# Altium PCB PCB1.PcbDoc
Units mil, origin at the board's own origin, x right, y up, seen from the top; angles counter-clockwise.
Board outline 2165.35 x 2165.35 mil, 4 copper layers (Top Layer, Int1 (GND), Int2 (PWR), Bottom Layer), stack 63.976 mil thick; 76 components, 69 nets, 302 pads, 1 vias.
Unrouted connection lines stored in the file: 210.
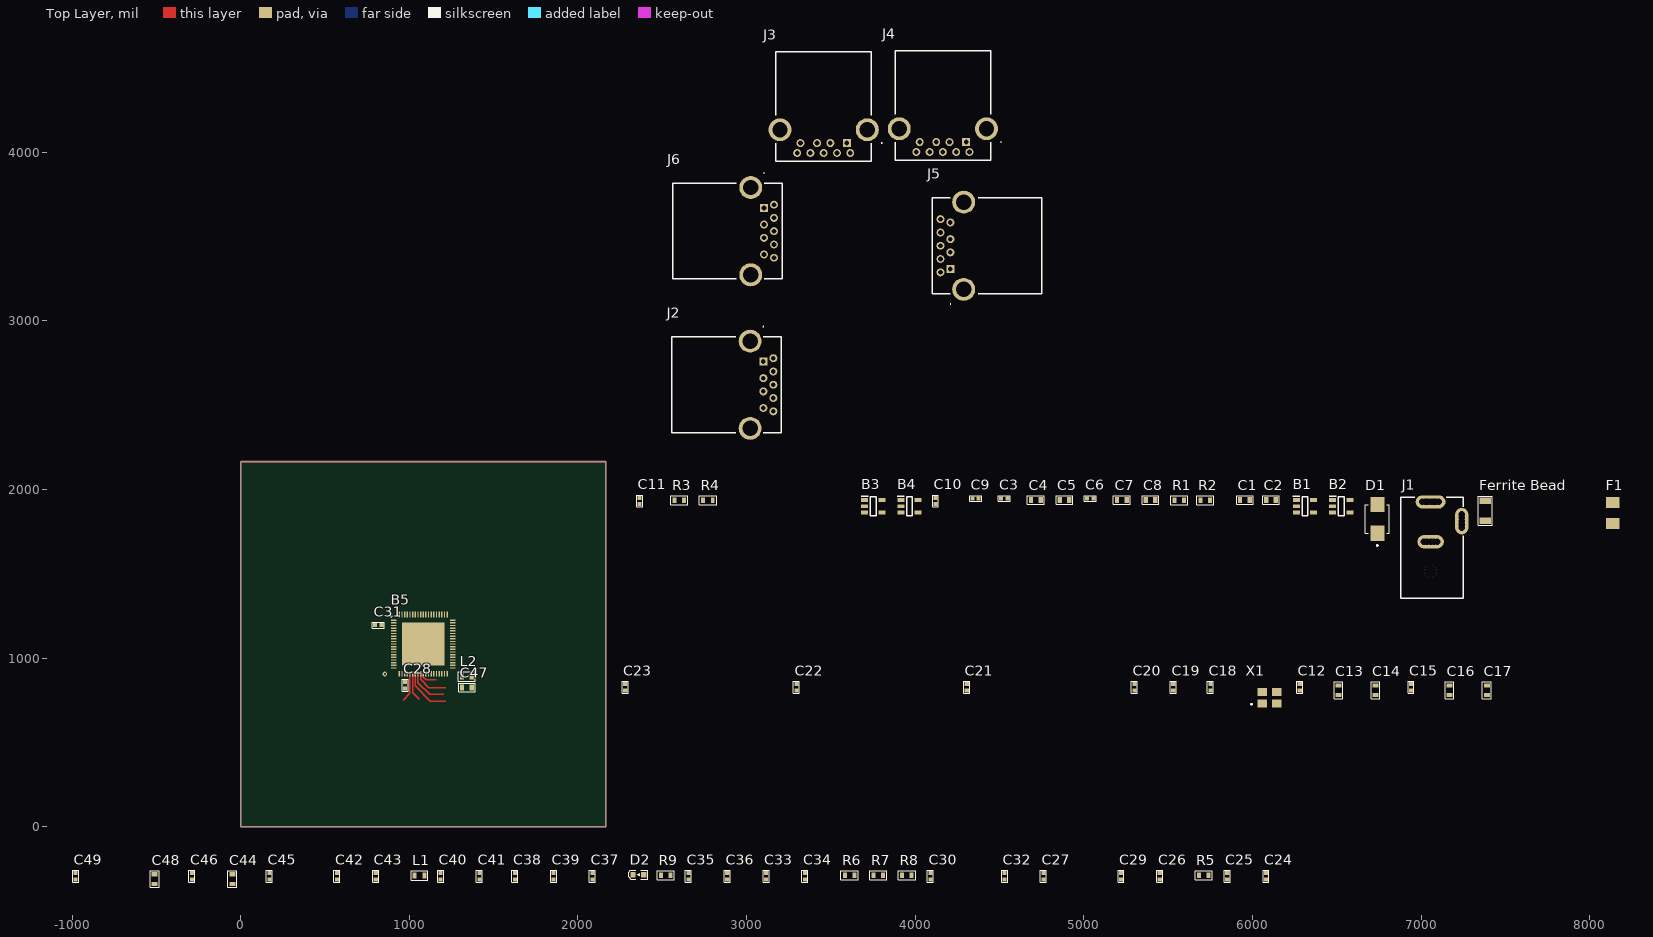
[diagram p0: Top Layer view]
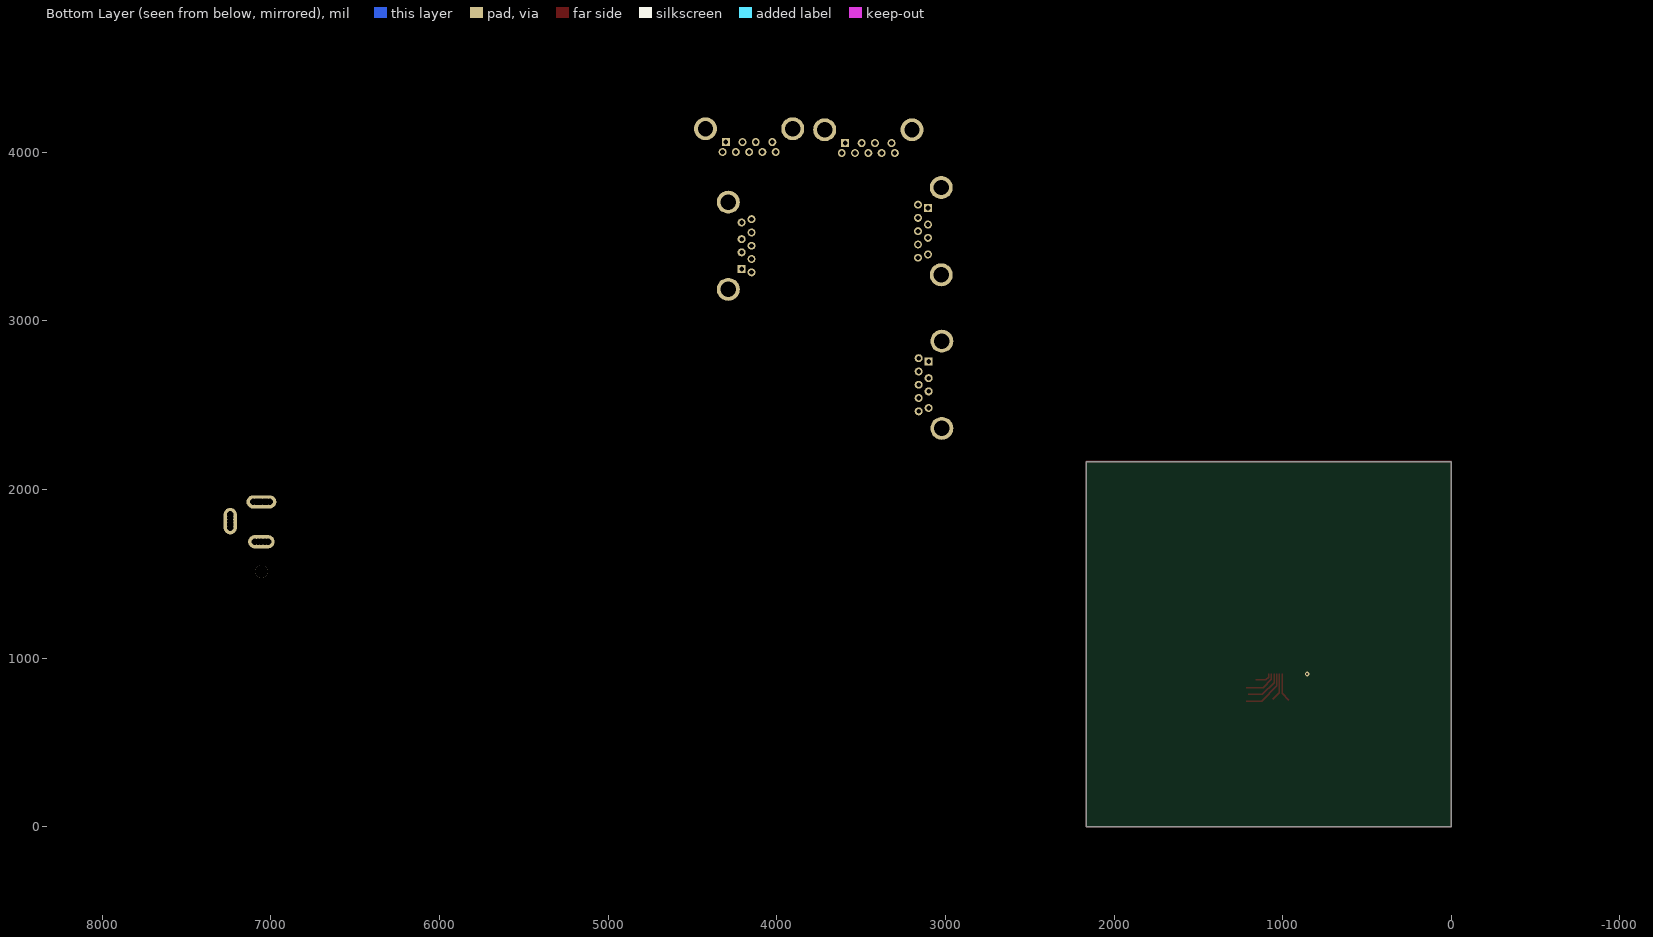
[diagram p1: Bottom Layer view, seen from below]
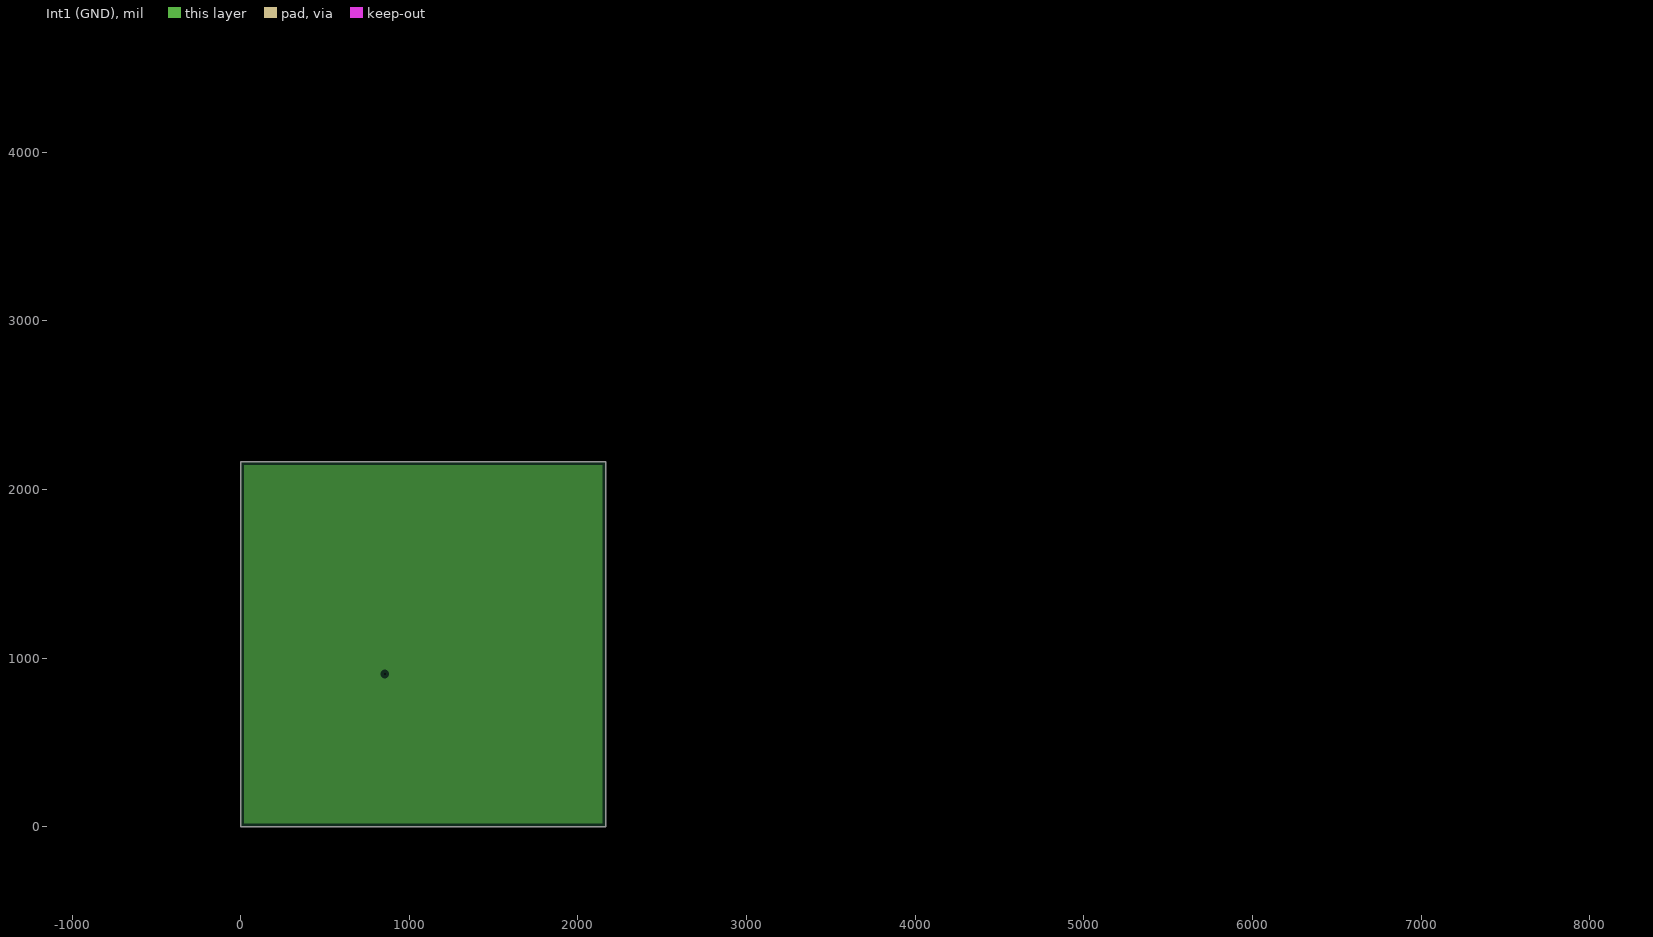
[diagram p2: Int1 (GND), clearances drawn from the general rule]
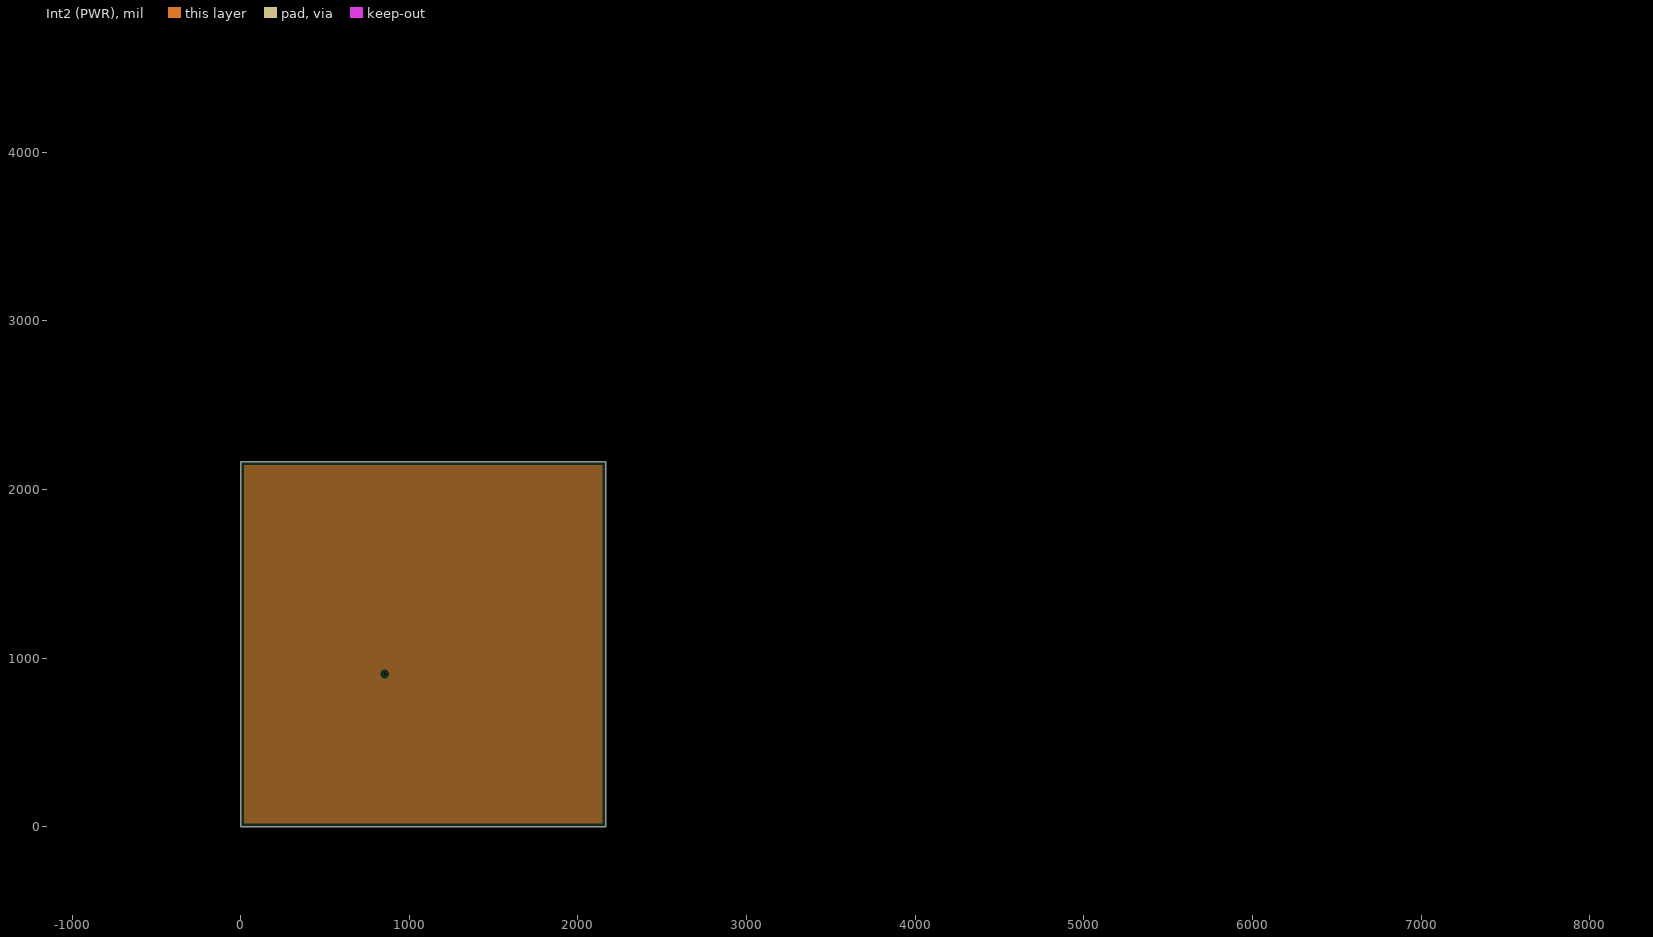
[diagram p3: Int2 (PWR), clearances drawn from the general rule]

## Layer stack, top to bottom
Top Solder: solder mask 1, SM-001, Dk 4
Top Layer: signal copper 1.378
Dielectric 1: prepreg 8.2677, PP-017, Dk 4.3
Int1 (GND): plane copper 0.689
Dielectric 3: core 43.3071, Core-039, Dk 4.8
Int2 (PWR): plane copper 0.689
Dielectric 5: prepreg 8.2677, PP-017, Dk 4.3
Bottom Layer: signal copper 1.378
Bottom Solder: solder mask 1, SM-001, Dk 4

## Board outline
0,0 0,2165.35 2165.35,2165.35 2165.35,0

## Design rules (kind name [scope] priority, off if disabled: settings)
Clearance [All] p1: gap=5 ignorepadtopadclearanceinfootprint=FALSE
DiffPairsRouting [All] p1: maxlimit=10 minlimit=10 mostfreqgap=10 toplayer_minwidth=15 toplayer_maxwidth=15 toplayer_prefwidth=15 bottomlayer_minwidth=15 bottomlayer_maxwidth=15 bottomlayer_prefwidth=15 maxuncoupledlength=500
PlaneClearance [All] p1: clearance=20
PlaneConnect [All] p1: planeconnectstyle=Relief reliefexpansion=20 reliefentries=4 reliefconductorwidth=10 reliefairgap=10
PolygonConnect [All] p1: connectstyle=Direct reliefconductorwidth=10 reliefentries=4 polygonreliefangle="90 Angle" airgapwidth=10
RoutingVias [All] p1: holewidth=28 width=50 viastyle="Through Hole" minholewidth=7.87 minwidth=17.72 maxholewidth=28 maxwidth=50
SolderMaskExpansion [All] p1: expansion=4 istentingtop=FALSE
SupplyNets "Schematic Supply Nets_11" [InNet('USB2')] p1: voltage=0.000
SupplyNets "Schematic Supply Nets_10" [InNet('USB3')] p2: voltage=0.000
SupplyNets "Schematic Supply Nets_9" [InNet('+5 Bus')] p3: voltage=0.000
SupplyNets "Schematic Supply Nets_8" [InNet('GND')] p4: voltage=0.000
SupplyNets "Schematic Supply Nets_7" [InNet('+5')] p5: voltage=0.000
SupplyNets "Schematic Supply Nets_6" [InNet('GNDGND')] p6: voltage=0.000
SupplyNets "Schematic Supply Nets_5" [InNet('USB4')] p7: voltage=0.000
SupplyNets "Schematic Supply Nets_4" [InNet('USB Bus')] p8: voltage=0.000
SupplyNets "Schematic Supply Nets_3" [InNet('+3v3')] p9: voltage=0.000
SupplyNets "Schematic Supply Nets_2" [InNet('USB1')] p10: voltage=0.000
SupplyNets "Schematic Supply Nets" [InNet('+1v1 Fil')] p11: voltage=0.000
Width [All] p1: maxlimit=39.37 minlimit=7.87 preferedwidth=11.81
27 further rules are at their usual default settings.

## Classes and differential pairs
differential pair SSTXO4: +SSTXO4_P -SSTXO4_N
differential pair SSTXO3: +SSTXO3_P -SSTXO3_N
differential pair SSTXO2: +SSTXO2_P -SSTXO2_N
differential pair SSTXO1: +SSTXO1_P -SSTXO1_N
differential pair SSTXI: +SSTXI_P -SSTXI_N
differential pair SSRXO4: +SSRXO4_P -SSRXO4_N
differential pair SSRXO3: +SSRXO3_P -SSRXO3_N
differential pair SSRXO2: +SSRXO2_P -SSRXO2_N
differential pair SSRXO1: +SSRXO1_P -SSRXO1_N
differential pair SSRXI: +SSRXI_P -SSRXI_N
differential pair DO4: +DO4_P -DO4_N
differential pair DO3: +DO3_P -DO3_N
differential pair DO2: +DO2_P -USB2
differential pair DO1: +DO1_P -DO1_N
differential pair DI: +DI_P -DI_N

## Components (designator, comment, footprint, x,y, rotation, side; value= is the part's Value field where it differs from the comment)
B1 "AP22818BKAWT-7" SOT95P280X100-5N 6311.73,1900 r0 top
B2 "AP22818BKAWT-7" SOT95P280X100-5N 6526.73,1900 r0 top
B3 "AP22818BKAWT-7" SOT95P280X100-5N 3751.73,1900 r0 top
B4 "AP22818BKAWT-7" SOT95P280X100-5N 3966.73,1900 r0 top
B5 "VL817-Q7_B0_" QFN40P900X900X90-77N-D 1082.68,1082.68 r0 top
C1 "10u" CAP0603 5831.73,1875 r0 top
C2 "10u" CAP0603 5986.73,1875 r0 top
C3 "100nF" CAP0402 4401.73,1840 r0 top
C4 "10u" CAP0603 4591.73,1875 r0 top
C5 "1u" CAP0603 4761.73,1875 r0 top
C6 "100nF" CAP0402 4911.73,1840 r0 top
C7 "10u" CAP0603 5101.73,1875 r0 top
C8 "1u" CAP0603 5271.73,1875 r0 top
C9 "100nF" CAP0402 4231.73,1840 r0 top
C10 "100nF" CAP0402 4226.73,1805 r90 top
C11 "33p" CAP0402 2471.73,1805 r90 top
C12 "100nF" CAP0402 6386.73,700 r90 top
C13 "10u" CAP0603 6571.73,685 r90 top
C14 "1u" CAP0603 6791.73,685 r90 top
C15 "100nF" CAP0402 7046.73,700 r90 top
C16 "10u" CAP0603 7231.73,685 r90 top
C17 "1u" CAP0603 7451.73,685 r90 top
C18 "33p" CAP0402 5856.73,700 r90 top
C19 "100nF" CAP0402 5636.73,700 r90 top
C20 "100nF" CAP0402 5406.73,700 r90 top
C21 "100nF" CAP0402 4411.73,700 r90 top
C22 "100nF" CAP0402 3401.73,700 r90 top
C23 "100nF" CAP0402 2386.73,700 r90 top
C24 "100nF" CAP0402 6186.73,-420 r90 top
C25 "100nF" CAP0402 5956.73,-420 r90 top
C26 "100nF" CAP0402 5556.73,-420 r90 top
C27 "100nF" CAP0402 4866.73,-420 r90 top
C28 "100nF" CAP0402 1081.06,712.56 r90 top
C29 "100nF" CAP0402 5326.73,-420 r90 top
C30 "100nF" CAP0402 4196.73,-420 r90 top
C31 "100nF" CAP0402 689.76,1088.94 r0 top
C32 "100nF" CAP0402 4636.73,-420 r90 top
C33 "100nF" CAP0402 3221.73,-420 r90 top
C34 "100nF" CAP0402 3451.73,-420 r90 top
C35 "100nF" CAP0402 2761.73,-420 r90 top
C36 "100nF" CAP0402 2991.73,-420 r90 top
C37 "100nF" CAP0402 2191.73,-420 r90 top
C38 "100nF" CAP0402 1731.73,-420 r90 top
C39 "100nF" CAP0402 1961.73,-420 r90 top
C40 "100nF" CAP0402 1291.73,-420 r90 top
C41 "100nF" CAP0402 1521.73,-420 r90 top
C42 "100nF" CAP0402 676.73,-420 r90 top
C43 "100nF" CAP0402 906.73,-420 r90 top
C44 "10u" CAP0603 11.73,-435 r90 top
C45 "100nF" CAP0402 276.73,-420 r90 top
C46 "100nF" CAP0402 -183.27,-420 r90 top
C47 "10u" CAP0603 1217.76,763.27 r0 top
C48 "4u7" CAP0603 -448.27,-435 r90 top
C49 "100nF" CAP0402 -873.27,-420 r90 top
D1 "SMBJ5V0A" DIOM4336X265N 6741.73,1825 r90 top
D2 "LED0603" LED_SMD_0603 716.73,-2075 r0 top
F1 "1206L300SLTHYR" FUSC3115X66N 8136.73,1860 r90 top
"Ferrite Bead" "HCB3216KF-601T30" IND1206 7526.73,1615 r90 top
J1 "Power Jack" "Power Jack" 7056.73,1355 r90 top
J2 "GSB4111312HR" GSB4111312HR 3100,2758.43 r0 top
J3 "GSB4111312HR" GSB4111312HR 3595.31,4054.06 r270 top
J4 "GSB4111312HR" GSB4111312HR 4302.17,4060 r270 top
J5 "GSB4111312HR" GSB4111312HR 4209.06,3307.2 r180 top
J6 "GSB4111312HR" GSB4111312HR 3103.74,3669.13 r0 top
L1 "2u2" IND0603 1061.73,-410 r0 top
L2 "4u7" IND0603 1339.76,1010.51 r180 top
R1 "100K" RES0603 5396.73,1880 r0 top
R2 "100K" RES0603 5551.73,1880 r0 top
R3 "100K" RES0603 2431.73,1880 r0 top
R4 "100K" RES0603 2601.73,1880 r0 top
R5 "6k04 1%" RES0603 5541.73,-345 r0 top
R6 "330" RES0603 3441.73,-345 r0 top
R7 "330" RES0603 3611.73,-345 r0 top
R8 "100K" RES0603 3781.73,-345 r0 top
R9 "100K" RES0603 2351.73,-345 r0 top
X1 "YSX321SL" YSX321SL 6101.73,765 r0 top

## Footprints (in the part's own frame and the unit in brackets; to place one, negate y for a bottom-side part, rotate by r counter-clockwise, add the part's x,y. Pads: shape width x height; smd on the part's side, far side on the other; paste and mask are expansions set on the pad)
CAP0402 [mm]
  rect 0.6x0.62 smd mask+0.06: 1(2.729,2.694) 2(3.689,2.694)
  silkscreen extent 2.31,2.24 4.11,3.14, body extent 2.66,2.42 3.76,2.97, height 0.32
CAP0603 [mm]
  rect 0.65x0.9 smd: 1(2.417,1.568) 2(3.867,1.568)
  silkscreen extent 1.89,0.92 4.39,2.22, body extent 2.32,1.14 3.97,1.99, height 0.4
DIOM4336X265N [mm]
  rect 2.28x2.12 smd: A(2.165,0) C(-2.165,0)
  silkscreen extent -4.1,-1.81 2.16,1.81, body extent -2.67,-1.81 2.67,1.81, height 2.65
FUSC3115X66N [mm]
  rect 1.65x2.03 smd: 1(-1.59,0) 2(1.59,0)
  body extent -1.59,-0.76 1.59,0.76, height 0.66
GSB4111312HR [mm]
  rect 1.2x1.2 hole 0.7: 1(0,0)
  round 1.2 hole 0.7: 2(0,-2.5) 3(0,-4.5) 4(0,-7) 5(1.5,-7.5) 6(1.5,-5.5) 7(1.5,-3.5) 8(1.5,-1.5) 9(1.5,0.5)
  round 3.45 hole 2.3: 10(-2,3.07) 11(-2,-10.07)
  silkscreen extent -13.78,-10.7 2.72,5.3
IND0603 [mm]
  rect 0.62x0.92 smd: 1(-0.768,3.061) 2(0.722,3.061)
  silkscreen extent -1.27,2.36 1.23,3.76, body extent -0.85,2.64 0.8,3.49, height 0.4
IND1206 [mm]
  rect 1.04x1.74 smd: 1(5.056,3.717) 2(8.076,3.717)
  silkscreen extent 4.37,2.67 8.77,4.77, body extent 4.92,2.87 8.22,4.57, height 0.94
LED_SMD_0603 [mm]
  rect 0.8x0.8 smd: 1(40.894,45.466) 2(42.494,45.466)
  silkscreen extent 40.24,44.81 43.15,46.12, body extent 40.89,45.07 42.49,45.87, height 0.7
"Power Jack" [mm] "Power Adaptor Jack"
  round 1.5 hole 1: 1(14.5,-1.25) 1(14.5,-0.8) 1(14.5,-0.4) 1(14.5,0.4) 1(14.5,0.8) 1(14.5,1.25) 2(8.5,-1) 2(8.5,1) 2(8.5,-0.5) 2(8.5,0.5) 3(10.6,-4.7) 3(11.1,-4.7) 3(12.1,-4.7) 3(12.6,-4.7)
  oval 2x4.5 hole 1: 1(14.5,0)
  oval 2x4 hole 1: 2(8.5,0)
  oval 4x2 hole 1: 3(11.6,-4.7)
  round 1.9 hole 2: MH(4,0)
  silkscreen extent 0,-4.9 15.2,4.5, body extent 0,-4.9 15.2,4.5, height 11
QFN40P900X900X90-77N-D [mm]
  rect 0.85x0.2 smd: 1(-4.45,3.6) 2(-4.45,3.2) 3(-4.45,2.8) 4(-4.45,2.4) 5(-4.45,2) 6(-4.45,1.6) 7(-4.45,1.2) 8(-4.45,0.8) 9(-4.45,0.4) 10(-4.45,0) 11(-4.45,-0.4) 12(-4.45,-0.8) 13(-4.45,-1.2) 14(-4.45,-1.6) 15(-4.45,-2) 16(-4.45,-2.4) 17(-4.45,-2.8) 18(-4.45,-3.2) 19(-4.45,-3.6) 39(4.45,-3.6) 40(4.45,-3.2) 41(4.45,-2.8) 42(4.45,-2.4) 43(4.45,-2) 44(4.45,-1.6) 45(4.45,-1.2) 46(4.45,-0.8) 47(4.45,-0.4) 48(4.45,0) 49(4.45,0.4) 50(4.45,0.8) 51(4.45,1.2) 52(4.45,1.6) 53(4.45,2) 54(4.45,2.4) 55(4.45,2.8) 56(4.45,3.2) 57(4.45,3.6)
  rect 0.2x0.85 smd: 20(-3.6,-4.45) 21(-3.2,-4.45) 22(-2.8,-4.45) 23(-2.4,-4.45) 24(-2,-4.45) 25(-1.6,-4.45) 26(-1.2,-4.45) 27(-0.8,-4.45) 28(-0.4,-4.45) 29(0,-4.45) 30(0.4,-4.45) 31(0.8,-4.45) 32(1.2,-4.45) 33(1.6,-4.45) 34(2,-4.45) 35(2.4,-4.45) 36(2.8,-4.45) 37(3.2,-4.45) 38(3.6,-4.45) 58(3.6,4.45) 59(3.2,4.45) 60(2.8,4.45) 61(2.4,4.45) 62(2,4.45) 63(1.6,4.45) 64(1.2,4.45) 65(0.8,4.45) 66(0.4,4.45) 67(0,4.45) 68(-0.4,4.45) 69(-0.8,4.45) 70(-1.2,4.45) 71(-1.6,4.45) 72(-2,4.45) 73(-2.4,4.45) 74(-2.8,4.45) 75(-3.2,4.45) 76(-3.6,4.45)
  rect 6.45x6.45 smd: 77(0,0)
  silkscreen extent -4.97,4.1 -4.77,4.3
RES0603 [mm]
  rect 0.6x0.85 smd: 1(3.576,1.427) 2(5.026,1.427)
  silkscreen extent 3,0.75 5.6,2.13, body extent 3.53,1.05 5.05,1.81, height 0.45
SOT95P280X100-5N [mm]
  rect 1.05x0.55 smd: 1(-1.3,0.95) 2(-1.3,0) 3(-1.3,-0.95) 4(1.3,-0.95) 5(1.3,0.95)
  silkscreen extent -1.83,-1.45 0.43,1.48
YSX321SL [mm]
  rect 1.4x1.2 smd: 1(-1.1,-0.85) 2(1.1,-0.85) 3(1.1,0.85) 4(-1.1,0.85)
  silkscreen extent -2.8,-1.1 -2.6,-0.9

## Part data
B1 B2 B3 B4: "USB Switch ICs USB Power Switch TSOT25 T&R 3K", Manufacturer_Name="Diodes Incorporated", Mouser Part Number=621-AP22818BKAWT-7, Arrow Part Number=AP22818BKAWT-7, Arrow Price/Stock=https://www.arrow.com/en/products/ap22818bkawt-7/diodes-incorporated?utm_currency=USD&region=nac, Datasheet Link=https://www.diodes.com/assets/Datasheets/AP22816_17_18.pdf, Geometry.Height=1mm, Manufacturer_Part_Number=AP22818BKAWT-7, Mouser Price/Stock=https://www.mouser.co.uk/ProductDetail/Diodes-Incorporated/AP22818BKAWT-7?qs=7D1LtPJG0i00w4y0p06PMw%3D%3D
B5: "QFN-76_9x9x04P USB ICs RoHS", Manufacturer_Name=VIA, Manufacturer_Part_Number=VL817-Q7(B0), Datasheet Link=https://item.szlcsc.com/210703.html, Geometry.Height=0.9mm
C1 C2 C4 C5 C7 C8 C13 C14 C16 C17 C44 C47 C48: library part CAP0603, "CAP0603"
C3 C6 C9 C10 C11 C12 C15 C18 C19 C20 C21 C22 C23 C24 C25 C26 C27 C28 C29 C30 C31 C32 C33 C34 C35 C36 C37 C38 C39 C40 C41 C42 C43 C45 C46 C49: library part CAP0402, "CAP0402"
D1: "DIODE, TVS, 5V, 600W, SMB; TVS Polarity:Unidirectional; Reverse Stand-Off Voltage Vrwm:5V; Breakdown Voltage Range:6.4V to 7V; Clamping Voltage Vc Max:9.2V; Peak Pulse Current Ippm:65.2A; Diode Case Style:SMB; No. of Pins:2; SVHC:No SVHC (19-Dec-2011); Al", Package="SMB-2 Fairchild Semiconductor", Check_prices=https://www.snapeda.com/parts/SMBJ5V0A/Fairchild+Imaging/view-part/?ref=eda, MF="Fairchild Semiconductor", MP=SMBJ5V0A, SnapEDA_Link=https://www.snapeda.com/parts/SMBJ5V0A/Fairchild+Imaging/view-part/?ref=snap
D2: library part LED_SMD_0603
F1: library part 046602.5NRHF, "475 Series 1206 Fast-Acting Fuse", Package=None, Check_prices=https://www.snapeda.com/parts/046602.5NRHF/Littelfuse/view-part/?ref=eda, MF=Littelfuse, MP=046602.5NRHF, SnapEDA_Link=https://www.snapeda.com/parts/046602.5NRHF/Littelfuse/view-part/?ref=snap
"Ferrite Bead": library part IND1206, "IND1206"
J2 J3 J4 J5 J6: "USB 3.2 GEN 2, Type A, Receptacle, Right Angle, 9 Pins, Shell with Nickel Plating, 30uin Gold, Dip 2.4mm, Blue High Temperature Housing, Tray Packaging", Manufacturer_Name="Amphenol Communications Solutions", Datasheet Link=https://cdn.amphenol-cs.com/media/wysiwyg/files/drawing/gsb4111xxxhr.pdf, Geometry.Height=7.94mm, Manufacturer_Part_Number=GSB4111312HR
L1 L2: library part IND0603, "IND0603"
R1 R2 R3 R4 R5 R6 R7 R8 R9: library part RES0603, "RES0603"
X1: "Crystal", Manufacturer_Name=YXC, Datasheet Link=https://datasheet.lcsc.com/szlcsc/YSX321SL-30MHZ-10PF-8PPM_C70576.pdf, Geometry.Height=0.8mm, Manufacturer_Part_Number=YSX321SL
J1: Adding Date=10/21/2009, Company=Personal, Designer="Saeid Jorablo", Project Name=Laser

## Via types
v1: diameter 27.56, hole 11.81, Top Layer to Bottom Layer, 1 vias

## Nets (pads, with @x,y where several pads share a name; then routed paths per layer and width w, separated by ;. In a path a pad name is that pad's centre, name@x,y a point inside that pad or via, vN(x,y) a via of type N, cw(c..) or ccw(c..) an arc to the next point about the centre after c; other vN are vias at no path point)
"1v1 Out": B5.39 L2.2
1v1FB: B5.40 L1.2
"+1v1 Fil": B5.3 B5.9 B5.12 B5.22 B5.46 B5.49 B5.61 B5.67 B5.70 B5.76 C28.2 C31.2 C34.2 C36.2 C39.2 C41.2 C43.2 C44.2 C45.2 C46.2 C47.2 C49.2 L1.1 L2.1
  other v1: 855,905
+3v3: B5.6 B5.15 B5.21 B5.29 B5.43 B5.52 B5.58 B5.64 B5.73 C27.2 C30.2 C33.2 C35.2 C38.2 C40.2 C42.2 C48.2 R1.2 R2.2 R3.2 R4.2 R7.2 | length 104.7
  Top Layer w8: B5.29 1082.74,907.42 1082.74,887.26 1100,870 1160,870
+5: "Ferrite Bead.2" B1.4 B2.4 B3.4 B4.4 B5.20 B5.38 C2.2 C5.2 C8.2 C14.2 C17.2 C29.2 C32.2
"+5 Bus": D1.A F1.1 J1.1
DI_N: B5.54 J5.2
DI_P: B5.53 J5.3
DO1_N: B5.8 J2.2
DO1_P: B5.7 J2.3
DO2_N: B5.75 J3.2
DO2_P: B5.74 J3.3
DO3_N: B5.66 J4.2
DO3_P: B5.65 J4.3
DO4_N: B5.17 J6.2
DO4_P: B5.16 J6.3
EN1: B1.1 B5.26 | length 289.6
  Top Layer w8: B5.26 1035.43,834.57 1125,745 1215,745
EN2: B2.1 B5.19
EN3: B3.1 B5.42
EN4: B4.1 B5.28 | length 202.4
  Top Layer w8: B5.28 1066.93,873.07 1115,825 1215,825
EXPON: B5.44 R6.2
GND: B1.2 B2.2 B3.2 B4.2 B5.23 B5.77 C2.1 C3.1 C4.1 C5.1 C6.1 C7.1 C8.1 C12.1 C13.1 C14.1 C15.1 C16.1 C17.1 C27.1 C28.1 C29.1 C30.1 C31.1 C32.1 C33.1 C34.1 C35.1 C36.1 C37.1 C38.1 C39.1 C40.1 C41.1 C42.1 C43.1 C44.1 C45.1 C46.1 C47.1 C48.1 C49.1 D1.C D2.1 J1.2 J1.3 J2.4 J2.7 J2.10 J2.11 J3.4 J3.7 J3.10 J3.11 J4.4 J4.7 J4.10 J4.11 J5.4 J5.7 J5.10 J5.11 J6.4 J6.7 J6.10 J6.11 R5.2 R9.1
GNDGND: C11.2 C18.1 X1.2 X1.4
NetC1_2: "Ferrite Bead.1" C1.2 F1.2
NetC9_2: C9.2 J2.9
NetC10_2: C10.2 J2.8
NetC19_2: C19.2 J3.9
NetC20_2: C20.2 J3.8
NetC21_2: C21.2 J4.9
NetC22_2: C22.2 J4.8
NetC25_2: C25.2 J6.9
NetC26_2: C26.2 J6.8
NetD2_2: D2.2 R6.1
OC1: B1.3 B5.25 R1.1 | length 166.8
  Top Layer w8: B5.25 1019.69,795.31 1058.32,756.68
OC2: B2.3 B5.18 R2.1
OC3: B3.3 B5.41 R3.1
OC4: B4.3 B5.27 R4.1 | length 236
  Top Layer w8: B5.27 1051.18,853.82 1120,785 1205,785
RESET: B5.24 C37.2 R7.1 | length 174
  Top Layer w8: 963.94,750 1003.94,790 B5.24
REXT: B5.57 R5.1
RXI_N: C24.2 J5.6
RXI_P: C23.2 J5.5
SSRXI_N: B5.50 C24.1
SSRXI_P: B5.51 C23.1
SSRXO1_N: B5.5 J2.5
SSRXO1_P: B5.4 J2.6
SSRXO2_N: B5.72 J3.5
SSRXO2_P: B5.71 J3.6
SSRXO3_N: B5.63 J4.5
SSRXO3_P: B5.62 J4.6
SSRXO4_N: B5.14 J6.5
SSRXO4_P: B5.13 J6.6
SSTXI_N: B5.47 J5.9
SSTXI_P: B5.48 J5.8
SSTXO1_N: B5.2 C10.1
SSTXO1_P: B5.1 C9.1
SSTXO2_N: B5.69 C20.1
SSTXO2_P: B5.68 C19.1
SSTXO3_N: B5.60 C22.1
SSTXO3_P: B5.59 C21.1
SSTXO4_N: B5.11 C26.1
SSTXO4_P: B5.10 C25.1
USB1: B1.5 C3.2 C4.2 J2.1
USB2: B2.5 C6.2 C7.2 J3.1
USB3: B3.5 C12.2 C13.2 J4.1
USB4: B4.5 C15.2 C16.2 J6.1
"USB Bus": J5.1 R8.2
VBUSDET: B5.45 R8.1 R9.2
XTALI: B5.55 C18.2 X1.1
XTALO: B5.56 C11.1 X1.3
pads on no net: B5.30 B5.31 B5.32 B5.33 B5.34 B5.35 B5.36 B5.37 C1.1 J1.MH
copper on no net: | length 8661.4
  Top Layer w10: 0,0 0,2165.35 2165.35,2165.35 2165.35,0 0,0

## Polygon pours and split planes (outlines as drawn)
no net on Int2 (PWR) (split plane): 2145.26,20.1 20.1,20.1 20.1,2145.26 2145.26,2145.26
no net on Int1 (GND) (split plane): 2145.26,20.1 20.1,20.1 20.1,2145.26 2145.26,2145.26